# Altium PCB Power_Box_V1.PcbDoc (part 2 of 2)
Units mm, origin at the board's own origin, x right, y up, seen from the top; angles counter-clockwise.
Board outline 100 x 80 mm, 2 copper layers (Top Layer, Bottom Layer); 207 components, 130 nets, 583 pads, 162 vias.
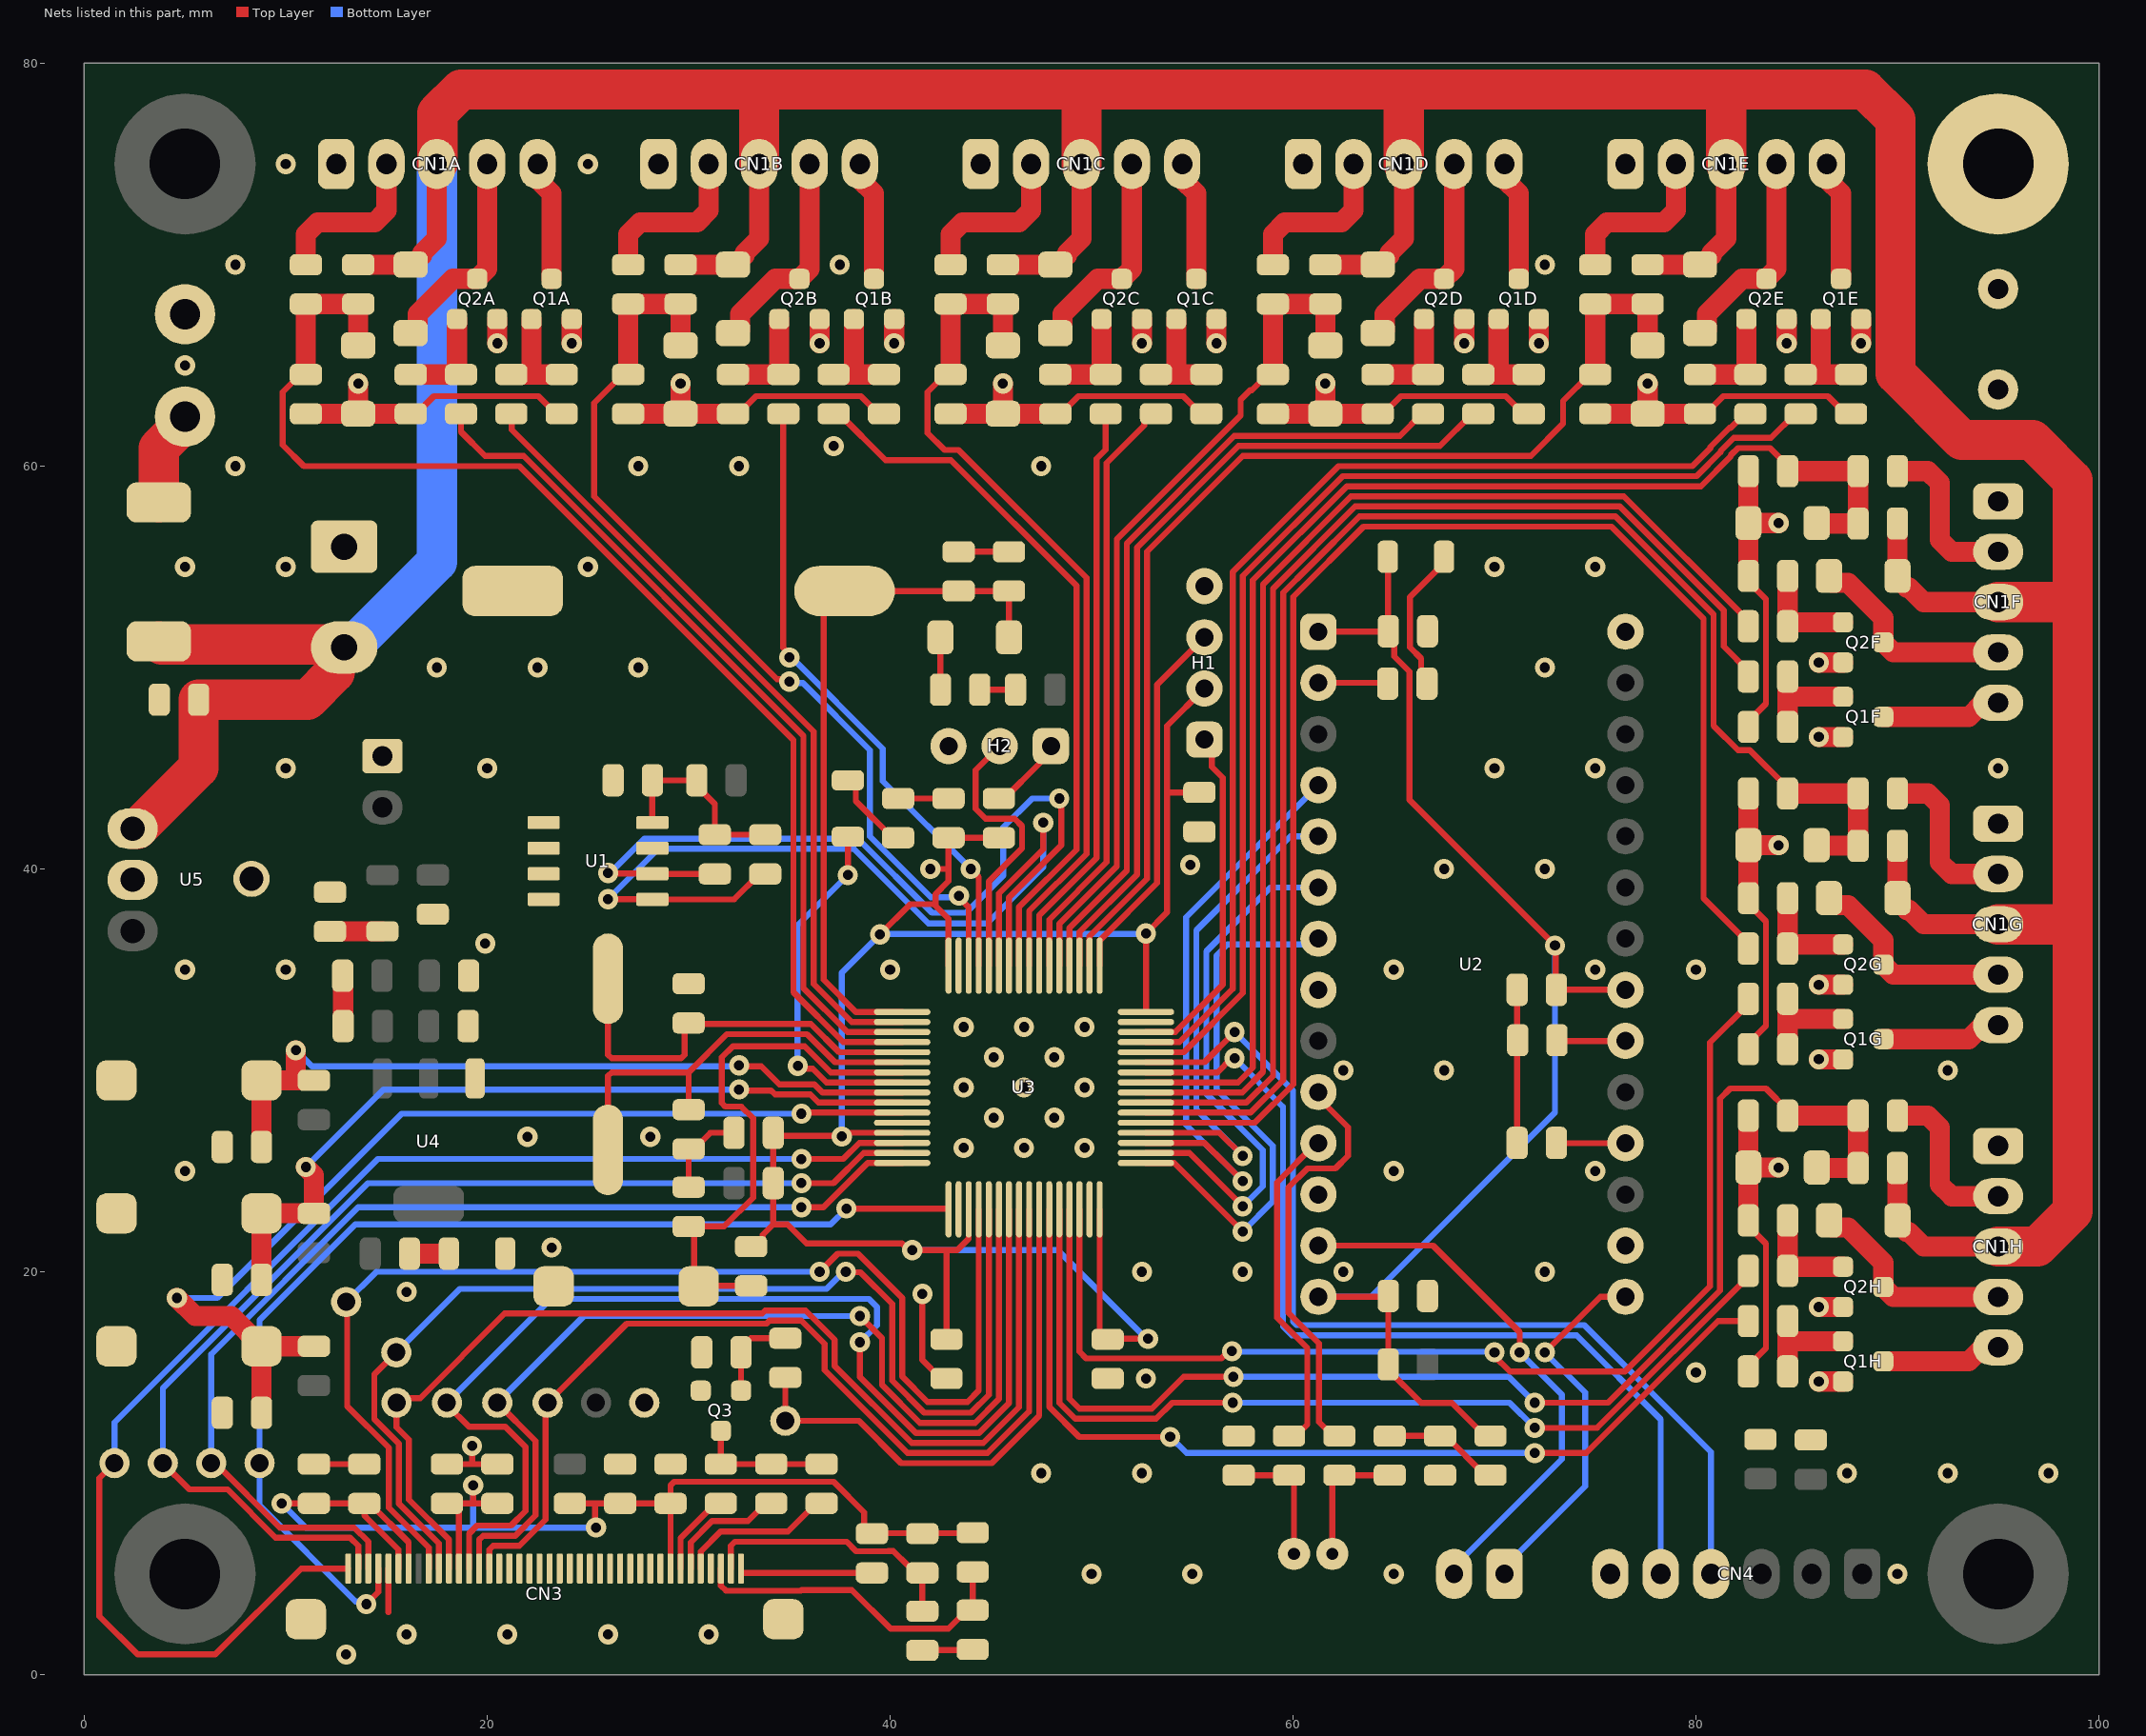
[diagram p2: the nets of this part, all layers, seen from the top]

## Via types
v1: diameter 1, hole 0.5, Top Layer to Bottom Layer, 108 vias
v2: diameter 1, hole 0.5, Top Layer to Bottom Layer, tented top, 54 vias

## Nets (pads, with @x,y where several pads share a name; then routed paths per layer and width w, separated by ;. In a path a pad name is that pad's centre, name@x,y a point inside that pad or via, vN(x,y) a via of type N, cw(c..) or ccw(c..) an arc to the next point about the centre after c; other vN are vias at no path point) (continued)
+12: C34.1 C36.1 CN1A.3 CN1B.3 CN1C.3 CN1D.3 CN1E.3 CN1F.3 CN1G.3 CN1H.3 D1A.2 D1B.2 D1C.2 D1D.2 D1E.2 D1F.2 D1G.2 D1H.2 D3.2 R6A.1 R6B.1 R6C.1 R6D.1 R6E.1 R6F.1 R6G.1 R6H.1 U5.1 | length 294.1
  Top Layer w1: R6A.1@13.6,70 D1A.2@16.2,70 16.305,70 16.792,70.487 16.792,70.592 17.5,71.3 CN1A.3@17.5,75 ; R6B.1@29.6,70 D1B.2@32.2,70 32.305,70 32.792,70.487 32.792,70.592 33.5,71.3 CN1B.3@33.5,75 ; R6C.1@45.6,70 D1C.2@48.2,70 48.305,70 48.792,70.487 48.792,70.592 49.5,71.3 CN1C.3@49.5,75 ; R6D.1@61.6,70 D1D.2@64.2,70 64.305,70 64.792,70.487 64.792,70.592 65.5,71.3 CN1D.3@65.5,75 ; R6E.1@77.6,70 D1E.2@80.2,70 80.305,70 80.792,70.487 80.792,70.592 81.5,71.3 CN1E.3@81.5,75 ; R6H.1@90,25.15 D1H.2@90,22.55 90,22.445 90.487,21.958 90.592,21.958 91.3,21.25 CN1H.3@95,21.25 ; R6G.1@90,41.15 D1G.2@90,38.55 90,38.445 90.487,37.958 90.592,37.958 91.3,37.25 CN1G.3@95,37.25 ; R6F.1@90,57.15 D1F.2@90,54.55 90,54.445 90.487,53.958 90.592,53.958 91.3,53.25 CN1F.3@95,53.25
  Top Layer w2: U5.1@2.4,42 2.65,42 5.675,45.025 C36.1@5.675,48.4 11.078,48.4 12.435,49.757 12.435,50.723 12.712,51 C34.1@12.9,51 12.75,51.15 3.85,51.15 D3.2@3.7,51.3 ; CN1A.3@17.5,75 17.528,75.028 17.528,77.528 18.7,78.7 33.4,78.7 ; CN1B.3@33.5,75 33.5,78.6 33.4,78.7 ; CN1C.3@49.5,75 49.5,78.6 ; CN1D.3@65.5,75 65.5,78.6 ; CN1E.3@81.5,75 81.5,78.6 ; CN1H.3@95,21.25 96.95,21.25 98.7,23 ; CN1G.3@95,37.25 98.6,37.25 ; CN1F.3@95,53.25 98.6,53.25 ; 98.7,37.25 98.7,23 ; 33.4,78.7 88.4,78.7 89.9,77.2 89.9,70.1 89.9,64.6 93.2,61.3 96.7,61.3 98.7,59.3 98.7,23
  Bottom Layer w2: C34.1@12.9,51 13.25,51 17.5,55.25 CN1A.3@17.5,75
+12_IN: D3.1 TR1.2 | length 4.8
  Top Layer w2: D3.1@3.7,58.2 3.7,60.889 5,62.189 TR1.2@5,62.46
GND: 
GND_MCU: BAT1.2 C1A.2 C1B.2 C1C.2 C2A.2 C2B.2 C2C.2 C2D.2 C2E.2 C2F.2 C2G.2 C2H.2 C3.2 C4.2 C7.2 C8.2 C9.2 C10.2 C11.1 C12.1 C13.1 C14.1 C15.1 C16.1 C17.1 C18.1 C19.1 C20.2 C21.2 C22.2 C23.2 C24.2 C25.1 C26.1 C27.1 C28.1 C29.1 C30.1 C31.2 C32.2 C33.2 C34.2 C35.2 C36.2 C37.2 CN1A.1 CN1B.1 CN1C.1 CN1D.1 CN1E.1 CN1F.1 CN1G.1 CN1H.1 CN3.5 CN3.16 CN3.17 CN3.18 CN3.19 CN3.20 CN3.21 CN3.22 CN3.23 CN3.24 CN3.25 CN3.26 CN3.27 CN3.28 CN3.29 CN3.30 CN3.31 CN3.32 CN3.37 CN3.41 CN3.42 CN4.6 H1.4 H2.3 LED2.2 Q1A.1 Q1B.1 Q1C.1 Q1D.1 Q1E.1 Q1F.1 Q1G.1 Q1H.1 Q2A.1 Q2B.1 Q2C.1 Q2D.1 Q2E.1 Q2F.1 Q2G.1 Q2H.1 Q3.1 R3A.2 R3B.2 R3C.2 R3D.2 R3E.2 R3F.2 R3G.2 R3H.2 R5A.1 R5B.1 R5C.1 R5D.1 R5E.1 R5F.1 R5G.1 R5H.1 R13.2 R14.2 R22.1 R23.2 R24.2 R29.2 R30.2 S1A.1 S1B.1 S1C.1 S2.1 TP1.1 TR1.1 U1.1 U1.2 U1.3 U1.4 U1.7 U2.8 U2.12 U2.16 U2.28 U3.12 U3.18 U3.31 U3.47 U3.63 U4.1 U5.2 U5.4 ZD1A.1 ZD1B.1 ZD1C.1 ZD1D.1 ZD1E.1 ZD1F.1 ZD1G.1 ZD1H.1 | length 173.6
  Top Layer w0.3: C13.1@11.4,10.45 C12.1@13.9,10.45 ; 15.1,3.1 CN3.5@15.1,5.265 ; R5A.1@16.202,62.6 16.477,62.6 17.352,63.475 22.547,63.475 23.422,62.6 R3A.2@23.697,62.6 ; C11.1@18,10.45 19.25,10.45 ; v2(19.25,11.35) 19.25,10.45 ; C14.1@20.5,10.45 19.25,10.45 ; C17.1@30,24.2 C19.1@30,26.1 30.275,26.1 31.075,26.9 C24.2@32.25,26.9 ; R5B.1@32.202,62.6 32.477,62.6 33.352,63.475 38.547,63.475 39.422,62.6 R3B.2@39.697,62.6 ; R29.2@40.4,43.5 C22.2@42.9,43.5 ; R23.2@41.6,1.2 41.625,1.225 44.075,1.225 R24.2@44.1,1.25 ; v1(41.6,18.9) 41.6,15.625 42.525,14.7 C23.2@42.8,14.7 ; C30.1@43.4,55.75 C29.1@45.9,55.75 ; R5C.1@48.202,62.6 48.477,62.6 49.352,63.475 54.547,63.475 55.422,62.6 R3C.2@55.697,62.6 ; R5D.1@64.202,62.6 64.477,62.6 65.352,63.475 70.547,63.475 71.422,62.6 R3D.2@71.697,62.6 ; C7.2@71.125,26.4 C9.2@71.125,34 ; R5E.1@80.202,62.6 80.477,62.6 81.352,63.475 86.547,63.475 87.422,62.6 R3E.2@87.697,62.6 ; R5H.1@82.6,22.548 82.6,22.273 83.475,21.398 83.475,16.203 82.6,15.328 R3H.2@82.6,15.053 ; R5G.1@82.6,38.548 82.6,38.273 83.475,37.398 83.475,32.203 82.6,31.328 R3G.2@82.6,31.053 ; R5F.1@82.6,54.548 82.6,54.273 83.475,53.398 83.475,48.203 82.6,47.328 R3F.2@82.6,47.053
  Top Layer w1: C2A.2@11,62.6 ZD1A.1@13.6,62.6 ; C25.1@12.825,34.7 12.85,34.675 12.85,34.35 C26.1@12.85,32.2 ; v2(13.6,64.1) ZD1A.1@13.6,62.6 ; R5A.1@16.202,62.6 ZD1A.1@13.6,62.6 ; v2(20.5,66.1) Q2A.1@20.5,67.3 ; v2(24.2,66.1) Q1A.1@24.2,67.3 ; C2B.2@27,62.6 ZD1B.1@29.6,62.6 ; v2(29.6,64.1) ZD1B.1@29.6,62.6 ; R5B.1@32.202,62.6 ZD1B.1@29.6,62.6 ; v2(36.5,66.1) Q2B.1@36.5,67.3 ; v2(40.2,66.1) Q1B.1@40.2,67.3 ; C2C.2@43,62.6 ZD1C.1@45.6,62.6 ; v2(45.6,64.1) ZD1C.1@45.6,62.6 ; R5C.1@48.202,62.6 ZD1C.1@45.6,62.6 ; v2(52.5,66.1) Q2C.1@52.5,67.3 ; v2(56.2,66.1) Q1C.1@56.2,67.3 ; C2D.2@59,62.6 ZD1D.1@61.6,62.6 ; v2(61.6,64.1) ZD1D.1@61.6,62.6 ; R5D.1@64.202,62.6 ZD1D.1@61.6,62.6 ; v2(68.5,66.1) Q2D.1@68.5,67.3 ; v2(72.2,66.1) Q1D.1@72.2,67.3 ; C2E.2@75,62.6 ZD1E.1@77.6,62.6 v2(77.6,64.1) ; ZD1E.1@77.6,62.6 R5E.1@80.202,62.6 ; R5H.1@82.6,22.548 82.6,25.15 C2H.2@82.6,27.75 ; ZD1H.1@82.6,25.175 v2(84.1,25.175) ; R5G.1@82.6,38.548 82.6,41.15 C2G.2@82.6,43.75 ; ZD1G.1@82.6,41.175 v2(84.1,41.175) ; R5F.1@82.6,54.548 82.6,57.15 C2F.2@82.6,59.75 ; ZD1F.1@82.6,57.175 v2(84.1,57.175) ; v2(84.5,66.1) Q2E.1@84.5,67.3 ; v2(86.1,14.55) Q1H.1@87.3,14.55 ; v2(86.1,18.25) Q2H.1@87.3,18.25 ; v2(86.1,30.55) Q1G.1@87.3,30.55 ; v2(86.1,34.25) Q2G.1@87.3,34.25 ; v2(86.1,46.55) Q1F.1@87.3,46.55 ; v2(86.1,50.25) Q2F.1@87.3,50.25 ; v2(88.2,66.1) Q1E.1@88.2,67.3
  other v1: 13,1 16,2 21,2 26,2 31,2 50,5 55,5 65,5 90,5 87.5,10 92.5,10 97.5,10 52.7,14.7 52.5,20 57.5,20 72.5,20 23.2,21.2 5,25 65,25 43.65,26.15 46.65,26.15 49.65,26.15 22,26.7 28.1,26.7 45.15,27.65 48.15,27.65 43.65,29.15 46.65,29.15 49.65,29.15 67.5,30 92.5,30 45.15,30.65 48.15,30.65 43.65,32.15 46.65,32.15 49.65,32.15 40,35 65,35 80,35 19.9,36.3 67.5,40 72.5,40 54.9,40.2 10,45 20,45 70,45 75,45 95,45 17.5,50 22.5,50 27.5,50 72.5,50 5,55 10,55 25,55 70,55 75,55 27.5,60 32.5,60 5,65 7.5,70 37.5,70 10,75 25,75
  other v2: 47.5,10 52.5,10 80,15 16,19 62.5,20 75,25 62.5,30 5,35 10,35 75,35 7.5,60 47.5,60 37.2,61 72.5,70
ISD_LED: R10.2 U2.2 | length 3.5
  Top Layer w0.3: U2.2@61.26,49.24 64.66,49.24 R10.2@64.7,49.2
ISD_MIC_N: C6.2 U2.11 | length 16.6
  Top Layer w0.3: C6.2@59.801,11.85 60.136,11.85 60.713,12.426 60.713,16.205 59.2,17.718 59.2,24.426 61.154,26.38 U2.11@61.26,26.38
ISD_MIC_P: C5.2 U2.10 | length 20.9
  Top Layer w0.3: U2.10@61.26,28.92 61.26,28.641 62.725,27.176 62.725,25.75 62.105,25.13 60.717,25.13 59.775,24.188 59.775,17.956 61.287,16.443 61.287,12.539 61.977,11.85 C5.2@62.301,11.85
ISD_MISO: U2.4 U3.35 | length 29.1
  Top Layer w0.3: U3.35@52.7,26.4 55.6,26.4 v1(57.5,24.5)
  Bottom Layer w0.3: v1(57.5,24.5) 54.7,27.3 54.7,37.6 U2.4@61.26,44.16
ISD_MOSI: U2.5 U3.36 | length 25.4
  Top Layer w0.3: U3.36@52.7,26.9 56.35,26.9 v2(57.5,25.75)
  Bottom Layer w0.3: v2(57.5,25.75) 55.2,28.05 55.2,36.95 59.87,41.62 U2.5@61.26,41.62
ISD_SCK: U2.6 U3.34 | length 27
  Top Layer w0.3: U3.34@52.7,25.9 54.85,25.9 v2(57.5,23.25)
  Bottom Layer w0.3: v2(57.5,23.25) 58.5,24.25 58.5,26.043 55.7,28.843 55.7,35.907 58.873,39.08 U2.6@61.26,39.08
ISD_SS: U2.7 U3.33 | length 27.1
  Top Layer w0.3: U3.33@52.7,25.4 54.1,25.4 v1(57.5,22)
  Bottom Layer w0.3: v1(57.5,22) 59,23.5 59,26.25 56.2,29.05 56.2,35.7 56.753,36.253 60.973,36.253 U2.7@61.26,36.54
MCU_BOOT0: H2.2 U3.60 | length 13.9
  Top Layer w0.3: U3.60@44.9,35.2 44.9,39.383 46.55,41.033 46.55,42.126 46.185,42.492 44.742,42.492 44.25,42.983 44.25,44.91 H2.2@45.44,46.1
MCU_KEY1: C1A.1 R1A.2 S1A.2 U3.9 | length 38.5
  Top Layer w0.3: v1(32.5,30.25) 32.55,30.2 33.6,30.2 34.5,29.3 36.243,29.3 36.643,28.9 U3.9@40.6,28.9
  Top Layer w1: C1A.1@8.8,26.2 S1A.2@8.8,29.5 10.4,29.5 ; v2(10.5,31) 10.5,29.6 10.4,29.5 ; R1A.2@11.4,29.5 10.4,29.5
  Bottom Layer w0.3: v2(10.5,31) 11.3,30.2 32.45,30.2 v1(32.5,30.25)
MCU_KEY2: C1B.1 R1B.2 S1B.2 U3.10 | length 39.8
  Top Layer w0.3: v2(32.5,29.05) 32.55,29 34.093,29 34.293,28.8 36.036,28.8 36.436,28.4 U3.10@40.6,28.4
  Top Layer w1: C1B.1@8.8,19.6 S1B.2@8.8,22.9 R1B.2@11.4,22.9 11.4,24.8 v1(11,25.2)
  Bottom Layer w0.3: v1(11,25.2) 14.85,29.05 v2(32.5,29.05)
MCU_KEY3: C1C.1 R1C.2 S1C.2 U3.11 | length 50.9
  Top Layer w0.3: v1(35.6,27.85) 35.65,27.9 U3.11@40.6,27.9
  Top Layer w1: v2(4.6,18.7) 5.503,17.797 7.303,17.797 S1C.2@8.8,16.3 ; C1C.1@8.8,13 S1C.2@8.8,16.3 ; R1C.2@11.4,16.3 S1C.2@8.8,16.3
  Bottom Layer w0.3: v2(4.6,18.7) 6.6,18.7 15.75,27.85 v1(35.6,27.85)
MCU_LED1: R2A.2 U3.2 | length 39.7
  Top Layer w0.3: R2A.2@21.197,62.6 21.213,62.585 21.213,61.801 36.2,46.814 36.2,34.293 38.093,32.4 U3.2@40.6,32.4
MCU_LED2: R2B.2 U3.57 | length 35.6
  Top Layer w0.3: R2B.2@37.197,62.6 37.472,62.6 39.773,60.3 43.016,60.3 49.25,54.066 49.25,40.957 46.4,38.107 46.4,36.45 U3.57@46.4,35.2
MCU_LED3: R2C.2 U3.54 | length 29.7
  Top Layer w0.3: U3.54@47.9,35.2 47.9,36.45 47.9,37.486 50.75,40.336 50.75,60.153 52.617,62.02 52.617,62.234 52.983,62.6 R2C.2@53.197,62.6
MCU_LED4: R2D.2 U3.51 | length 41.6
  Top Layer w0.3: U3.51@49.4,35.2 49.4,36.864 52.25,39.714 52.25,54.257 52.25,55.957 57.293,61 58.993,61 67.3,61 68.9,62.6 R2D.2@69.197,62.6
MCU_LED5: R2E.2 U3.44 | length 57.8
  Top Layer w0.3: U3.44@52.7,30.9 54.571,30.9 57.51,33.839 57.51,54.546 62.464,59.5 80.033,59.5 81.225,60.692 81.225,60.748 81.877,61.4 83.722,61.4 84.922,62.6 R2E.2@85.197,62.6
MCU_LED6: R2F.2 U3.39 | length 61
  Top Layer w0.3: U3.39@52.7,28.4 57.686,28.4 59.01,29.724 59.01,53.924 63.086,58 75.514,58 76.214,58 81.375,52.839 81.375,52.139 81.375,51.053 82.6,49.828 R2F.2@82.6,49.553
MCU_LED7: R2G.2 U3.30 | length 56
  Top Layer w0.3: U3.30@49.4,23.1 49.4,17.366 49.4,16.034 49.734,15.7 56.444,15.7 56.805,16.06 v1(56.97,16.06) ; v1(70,16) 70,15.811 70.761,15.05 76.479,15.05 80.7,19.271 80.7,31.377 82.6,33.278 R2G.2@82.6,33.553
  Bottom Layer w0.3: v1(56.97,16.06) 57,16.03 69.97,16.03 v1(70,16)
MCU_LED8: R2H.2 U3.27 | length 48.2
  Top Layer w0.3: U3.27@47.9,23.1 47.9,17.988 47.9,13.286 49.386,11.8 v2(53.9,11.8) ; v1(72,11) 74.55,11 81.103,17.553 R2H.2@82.6,17.553
  Bottom Layer w0.3: v2(53.9,11.8) 53.911,11.8 54.711,11 v1(72,11)
MCU_LOCK1: R4A.1 U3.3 | length 42.5
  Top Layer w0.3: R4A.1@18.701,62.6 18.701,61.699 19.9,60.5 20.807,60.5 21.807,60.5 35.7,46.607 35.7,45.607 35.7,34.086 37.886,31.9 U3.3@40.6,31.9
MCU_LOCK2: R4B.1 U3.61 | length 31.5
  Top Layer w0.3: R4B.1@34.701,62.6 34.701,50.988 35,50.689 v1(35,50.5) ; v1(44,40) 44.4,39.6 U3.61@44.4,35.2
  Bottom Layer w0.3: v1(35,50.5) 35.107,50.5 39.633,45.974 39.633,44.367 v1(44,40)
MCU_LOCK3: R4C.1 U3.55 | length 28.8
  Top Layer w0.3: U3.55@47.4,35.2 47.4,37.693 50.25,40.543 50.25,60.36 50.7,60.81 50.7,62.599 R4C.1@50.701,62.6
MCU_LOCK4: R4D.1 U3.52 | length 39.8
  Top Layer w0.3: U3.52@48.9,35.2 48.9,36.45 48.9,37.071 51.75,39.921 51.75,56.164 57.086,61.5 65.3,61.5 66.4,62.6 R4D.1@66.701,62.6
MCU_LOCK5: R4E.1 U3.45 | length 55.1
  Top Layer w0.3: U3.45@52.7,31.4 54.364,31.4 57.01,34.046 57.01,54.753 62.257,60 79.826,60 80.725,60.899 80.725,60.955 81.67,61.9 81.726,61.9 82.426,62.6 R4E.1@82.701,62.6
MCU_LOCK6: R4F.1 U3.40 | length 59.2
  Top Layer w0.3: U3.40@52.7,28.9 57.479,28.9 58.51,29.931 58.51,54.131 62.879,58.5 76.424,58.5 82.6,52.324 R4F.1@82.6,52.049
MCU_LOCK7: R4G.1 U3.37 | length 73.3
  Top Layer w0.3: U3.37@52.7,27.4 58.1,27.4 60.01,29.31 60.01,53.51 63.5,57 75.8,57 80.375,52.425 80.375,38.549 82.6,36.324 R4G.1@82.6,36.049
MCU_LOCK8: R4H.1 U3.28 | length 48.4
  Top Layer w0.3: U3.28@48.4,23.1 48.4,17.78 48.4,13.493 49.193,12.7 53.2,12.7 54,13.5 v1(57,13.5) ; v1(72,12.25) 75.093,12.25 82.6,19.757 R4H.1@82.6,20.049
  Bottom Layer w0.3: v1(57,13.5) 70.75,13.5 v1(72,12.25)
MCU_MAGNET1: C2A.1 R6A.2 R7A.2 U3.4 ZD1A.2 | length 62.7
  Top Layer w0.3: C2A.1@11,64.55 10.725,64.55 9.85,63.675 9.85,61.05 10.9,60 21.6,60 35.2,46.4 35.2,33.879 37.679,31.4 U3.4@40.6,31.4
  Top Layer w1: C2A.1@11,64.55 11,66.3 R7A.2@11,68.05 R6A.2@13.6,68.05 ZD1A.2@13.6,66
MCU_MAGNET2: C2B.1 R6B.2 R7B.2 U3.62 ZD1B.2 | length 47.6
  Top Layer w0.3: C2B.1@27,64.55 26.725,64.55 25.3,63.125 25.3,58.5 34.378,49.422 34.878,49.422 v1(35,49.3) ; v1(43.418,38.674) 43.418,38.582 43.9,38.1 U3.62@43.9,35.2
  Top Layer w1: C2B.1@27,64.55 R7B.2@27,68.05 R6B.2@29.6,68.05 ZD1B.2@29.6,66
  Bottom Layer w0.3: v1(35,49.3) 35.072,49.228 35.672,49.228 39,45.9 39,41.614 42.014,38.6 43.345,38.6 v1(43.418,38.674)
MCU_MAGNET3: C2C.1 R6C.2 R7C.2 U3.56 ZD1C.2 | length 43
  Top Layer w0.3: C2C.1@43,64.55 42.725,64.55 41.85,63.675 41.85,61.65 42.7,60.8 43.4,60.8 49.75,54.45 49.75,40.75 46.9,37.9 U3.56@46.9,35.2
  Top Layer w1: C2C.1@43,64.55 R7C.2@43,68.05 R6C.2@45.6,68.05 ZD1C.2@45.6,66
MCU_MAGNET4: C2D.1 R6D.2 R7D.2 U3.53 ZD1D.2 | length 42.1
  Top Layer w0.3: U3.53@48.4,35.2 48.4,37.278 51.25,40.128 51.25,56.371 57.4,62.521 57.4,63.3 57.872,63.772 57.947,63.772 58.725,64.55 C2D.1@59,64.55
  Top Layer w1: C2D.1@59,64.55 R7D.2@59,68.05 R6D.2@61.6,68.05 ZD1D.2@61.6,66
MCU_MAGNET5: C2E.1 R6E.2 R7E.2 U3.50 ZD1E.2 | length 56.4
  Top Layer w0.3: U3.50@49.9,35.2 49.9,36.657 52.75,39.507 52.75,55.75 57.5,60.5 71.8,60.5 73.4,62.1 73.4,63.225 74.725,64.55 C2E.1@75,64.55
  Top Layer w1: C2E.1@75,64.55 R7E.2@75,68.05 R6E.2@77.6,68.05 ZD1E.2@77.6,66
MCU_MAGNET6: C2F.1 R6F.2 R7F.2 U3.41 ZD1F.2 | length 67.9
  Top Layer w0.3: U3.41@52.7,29.4 57.272,29.4 58.01,30.138 58.01,54.338 62.672,59 80.24,59 81.725,60.485 81.725,60.541 82.084,60.9 83.675,60.9 84.55,60.025 C2F.1@84.55,59.75
  Top Layer w1: C2F.1@84.55,59.75 R7F.2@88.05,59.75 R6F.2@88.05,57.15 ZD1F.2@86,57.15
MCU_MAGNET7: C2G.1 R6G.2 R7G.2 U3.38 ZD1G.2 | length 75.5
  Top Layer w0.3: U3.38@52.7,27.9 57.893,27.9 59.51,29.517 59.51,53.717 60.83,55.037 63.293,57.5 74.107,57.5 75.307,57.5 76.007,57.5 80.875,52.632 80.875,51.932 80.875,47.112 82.084,45.903 82.672,45.903 84.55,44.025 C2G.1@84.55,43.75
  Top Layer w1: C2G.1@84.55,43.75 R7G.2@88.05,43.75 R6G.2@88.05,41.15 ZD1G.2@86,41.15
MCU_MAGNET8: C2H.1 R6H.2 R7H.2 U3.29 ZD1H.2 | length 67.4
  Top Layer w0.3: U3.29@48.9,23.1 48.9,17.573 48.9,13.7 49.4,13.2 52.993,13.2 54.578,14.785 v2(57.037,14.785) ; v1(71.998,13.498) 75.634,13.498 81.2,19.064 81.2,28.6 81.7,29.1 83.475,29.1 84.55,28.025 C2H.1@84.55,27.75
  Top Layer w1: C2H.1@84.55,27.75 R7H.2@88.05,27.75 R6H.2@88.05,25.15 ZD1H.2@86,25.15
  Bottom Layer w0.3: v2(57.037,14.785) 70.711,14.785 v1(71.998,13.498)
MCU_NRST: C17.2 R25.1 S2.2 U3.7 | length 27.4
  Top Layer w0.3: R25.1@33.1,19.3 30.525,19.3 S2.2@30.5,19.275 30.269,19.506 30.269,21.981 C17.2@30,22.25 31.766,22.25 33.2,23.684 33.2,27.616 32.616,28.2 31.824,28.2 31.648,28.376 31.648,30.648 32.2,31.2 35.757,31.2 37.057,29.9 U3.7@40.6,29.9
MCU_OCS_N: C18.2 U3.5 Y1.1 | length 20.6
  Top Layer w0.3: Y1.1@26,34.55 26,30.776 26.176,30.6 29.624,30.6 29.8,30.776 29.8,32.15 C18.2@30,32.35 30.05,32.3 36.072,32.3 37.472,30.9 U3.5@40.6,30.9
MCU_OCS_P: C19.2 U3.6 Y1.2 | length 21.6
  Top Layer w0.3: Y1.2@26,26.05 26,29.724 26.176,29.9 30,29.9 ; C19.2@30,28.05 30,29.9 ; U3.6@40.6,30.4 37.264,30.4 35.864,31.8 31.9,31.8 30,29.9
MCU_RXD: CN4.4 U3.43 | length 50.1
  Top Layer w0.3: U3.43@52.7,30.4 55.6,30.4 v1(57.1,31.9)
  Bottom Layer w0.3: v1(57.1,31.9) 60,29 60,17.526 60.176,17.35 74.457,17.35 80.75,11.057 CN4.4@80.75,5
MCU_SCL: R8.2 U1.6 U3.58 | length 43.1
  Top Layer w0.3: v2(26,39.8) 26.02,39.78 28.18,39.78 28.205,39.755 31.295,39.755 R8.2@31.3,39.75 ; U3.58@45.9,35.2 45.9,38.58 48.5,41.18 48.5,43.4 v1(48.4,43.5)
  Bottom Layer w0.3: v2(26,39.8) 26.1,39.8 27.8,41.5 38.407,41.5 42.083,37.824 43.77,37.824 45.617,39.671 45.617,42.067 47.05,43.5 v1(48.4,43.5)
MCU_SDA: R9.2 U1.5 U3.59 | length 43.9
  Top Layer w0.3: v2(26,38.5) 26.005,38.495 28.195,38.495 U1.5@28.2,38.49 32.265,38.49 33.525,39.75 R9.2@33.8,39.75 ; U3.59@45.4,35.2 45.4,38.787 47.6,40.987 v1(47.6,42.3)
  Bottom Layer w0.3: v2(26,38.5) 28.5,41 38.2,41 41.9,37.3 44.807,37.3 47.6,40.093 v1(47.6,42.3)
MCU_SWCLK: H1.3 U3.49 | length 18.5
  Top Layer w0.3: U3.49@50.4,35.2 50.4,36.45 53.25,39.3 53.25,49.15 H1.3@55.6,51.5
MCU_SWDIO: H1.1 U3.46 | length 17.3
  Top Layer w0.3: U3.46@52.7,31.9 54.157,31.9 56.51,34.253 56.51,44.533 55.973,45.07 55.973,46.047 H1.1@55.6,46.42
MCU_TXD: CN4.5 U3.42 | length 47.3
  Top Layer w0.3: U3.42@52.7,29.9 56.244,29.9 56.944,30.6 v1(57.1,30.6)
  Bottom Layer w0.3: v1(57.1,30.6) 59.5,28.2 59.5,17.293 59.943,16.85 74.074,16.85 78.25,12.674 CN4.5@78.25,5
MCU_VBAT: BAT1.1 C29.2 C30.2 D2.2 U3.1 | length 34.9
  Top Layer w0.3: U3.1@40.6,32.9 38.3,32.9 36.7,34.5 36.7,53.085 37.415,53.8 C30.2@43.4,53.8 C29.2@45.9,53.8 D2.2@45.9,51.5
NetC4_1: C4.1 R11.2 R12.1 | length 5.8
  Top Layer w0.3: R12.1@64.799,11.85 C4.1@67.299,11.85 ; C4.1@67.299,11.85 67.575,11.85 69.524,9.9 R11.2@69.8,9.9
NetC5_1: C5.1 MIC1.1 R12.2 | length 6.5
  Top Layer w0.3: MIC1.1@61.95,6 61.95,9.548 C5.1@62.301,9.9 R12.2@64.799,9.9
NetC6_1: C6.1 MIC1.2 R14.1 | length 6.5
  Top Layer w0.3: R14.1@57.3,9.9 59.8,9.9 60.05,9.65 MIC1.2@60.05,6
NetC7_1: C7.1 U2.18 | length 3.4
  Top Layer w0.3: C7.1@73.075,26.4 73.095,26.38 U2.18@76.5,26.38
NetC33_1: C33.1 SC2.1
NetCN1A_2: CN1A.2 R7A.1 | length 8.3
  Top Layer w1: R7A.1@11,70 11,71.514 11.586,72.1 14.414,72.1 15,72.686 CN1A.2@15,75
NetCN1A_4: CN1A.4 D1A.1 Q2A.3 | length 10.8
  Top Layer w1: D1A.1@16.2,66.6 16.4,66.6 16.55,66.75 16.55,67.55 18.3,69.3 Q2A.3@19.5,69.3 20,69.8 CN1A.4@20,75
NetCN1A_5: CN1A.5 Q1A.3 | length 6
  Top Layer w1: CN1A.5@22.5,75 22.5,74.244 23.2,73.544 Q1A.3@23.2,69.3
NetCN1B_2: CN1B.2 R7B.1 | length 8.3
  Top Layer w1: R7B.1@27,70 27,71.514 27.586,72.1 30.414,72.1 31,72.686 CN1B.2@31,75
NetCN1B_4: CN1B.4 D1B.1 Q2B.3 | length 10.8
  Top Layer w1: D1B.1@32.2,66.6 32.4,66.6 32.55,66.75 32.55,67.55 34.3,69.3 Q2B.3@35.5,69.3 36,69.8 CN1B.4@36,75
NetCN1B_5: CN1B.5 Q1B.3 | length 6
  Top Layer w1: CN1B.5@38.5,75 38.5,74.244 39.2,73.544 Q1B.3@39.2,69.3
NetCN1C_2: CN1C.2 R7C.1 | length 8.3
  Top Layer w1: R7C.1@43,70 43,71.514 43.586,72.1 46.414,72.1 47,72.686 CN1C.2@47,75
NetCN1C_4: CN1C.4 D1C.1 Q2C.3 | length 10.8
  Top Layer w1: D1C.1@48.2,66.6 48.4,66.6 48.55,66.75 48.55,67.55 50.3,69.3 Q2C.3@51.5,69.3 52,69.8 CN1C.4@52,75
NetCN1C_5: CN1C.5 Q1C.3 | length 6
  Top Layer w1: CN1C.5@54.5,75 54.5,74.244 55.2,73.544 Q1C.3@55.2,69.3
NetCN1D_2: CN1D.2 R7D.1 | length 8.3
  Top Layer w1: R7D.1@59,70 59,71.514 59.586,72.1 62.414,72.1 63,72.686 CN1D.2@63,75
NetCN1D_4: CN1D.4 D1D.1 Q2D.3 | length 10.8
  Top Layer w1: D1D.1@64.2,66.6 64.4,66.6 64.55,66.75 64.55,67.55 66.3,69.3 Q2D.3@67.5,69.3 68,69.8 CN1D.4@68,75
NetCN1D_5: CN1D.5 Q1D.3 | length 6
  Top Layer w1: CN1D.5@70.5,75 70.5,74.244 71.2,73.544 Q1D.3@71.2,69.3
NetCN1E_2: CN1E.2 R7E.1 | length 8.3
  Top Layer w1: R7E.1@75,70 75,71.514 75.586,72.1 78.414,72.1 79,72.686 CN1E.2@79,75
NetCN1E_4: CN1E.4 D1E.1 Q2E.3 | length 10.8
  Top Layer w1: D1E.1@80.2,66.6 80.4,66.6 80.55,66.75 80.55,67.55 82.3,69.3 Q2E.3@83.5,69.3 84,69.8 CN1E.4@84,75
NetCN1E_5: CN1E.5 Q1E.3 | length 6
  Top Layer w1: CN1E.5@86.5,75 86.5,74.244 87.2,73.544 Q1E.3@87.2,69.3
NetCN1F_2: CN1F.2 R7F.1 | length 8.3
  Top Layer w1: R7F.1@90,59.75 91.514,59.75 92.1,59.164 92.1,56.336 92.686,55.75 CN1F.2@95,55.75
NetCN1F_4: CN1F.4 D1F.1 Q2F.3 | length 10.8
  Top Layer w1: D1F.1@86.6,54.55 86.6,54.35 86.75,54.2 87.55,54.2 89.3,52.45 Q2F.3@89.3,51.25 89.8,50.75 CN1F.4@95,50.75
NetCN1F_5: CN1F.5 Q1F.3 | length 6
  Top Layer w1: Q1F.3@89.3,47.55 93.544,47.55 94.244,48.25 CN1F.5@95,48.25
NetCN1G_2: CN1G.2 R7G.1 | length 8.3
  Top Layer w1: R7G.1@90,43.75 91.514,43.75 92.1,43.164 92.1,40.336 92.686,39.75 CN1G.2@95,39.75
NetCN1G_4: CN1G.4 D1G.1 Q2G.3 | length 10.8
  Top Layer w1: D1G.1@86.6,38.55 86.6,38.35 86.75,38.2 87.55,38.2 89.3,36.45 Q2G.3@89.3,35.25 89.8,34.75 CN1G.4@95,34.75
NetCN1G_5: CN1G.5 Q1G.3 | length 6
  Top Layer w1: Q1G.3@89.3,31.55 93.544,31.55 94.244,32.25 CN1G.5@95,32.25
NetCN1H_2: CN1H.2 R7H.1 | length 8.3
  Top Layer w1: R7H.1@90,27.75 91.514,27.75 92.1,27.164 92.1,24.336 92.686,23.75 CN1H.2@95,23.75
NetCN1H_4: CN1H.4 D1H.1 Q2H.3 | length 10.8
  Top Layer w1: D1H.1@86.6,22.55 86.6,22.35 86.75,22.2 87.55,22.2 89.3,20.45 Q2H.3@89.3,19.25 89.8,18.75 CN1H.4@95,18.75
NetCN1H_5: CN1H.5 Q1H.3 | length 6
  Top Layer w1: Q1H.3@89.3,15.55 93.544,15.55 94.244,16.25 CN1H.5@95,16.25
NetD2_1: D2.1 R28.1 | length 2.6
  Top Layer w0.3: R28.1@42.5,48.9 D2.1@42.5,51.5
NetFB5_2: FB5.2 R28.2 | length 1.8
  Top Layer w0.3: R28.2@44.45,48.9 FB5.2@46.225,48.9
NetH2_1: H2.1 R26.2 | length 3.8
  Top Layer w0.3: R26.2@45.4,43.5 45.675,43.5 47.415,45.24 47.415,45.535 H2.1@47.98,46.1
NetLED1_2: LED1.2 R10.1 | length 7.4
  Top Layer w0.3: R10.1@66.65,49.2 66.359,49.491 66.359,50.45 65.8,51.009 65.8,53.5 67.5,55.2 LED1.2@67.5,55.5
NetLED2_1: LED2.1 R27.2 | length 2
  Top Layer w1: R27.2@16.15,20.9 LED2.1@18.1,20.9
NetLED3_1: LED3.1 U3.8 | length 17.9
  Top Layer w0.3: v1(35.422,30.222) 35.556,30.088 36.162,30.088 36.85,29.4 U3.8@40.6,29.4 ; v2(37.9,39.7) LED3.1@37.9,41.6
  Bottom Layer w0.3: v1(35.422,30.222) 35.4,30.244 35.4,37.2 v2(37.9,39.7)
NetLED3_2: LED3.2 R29.1 | length 4.1
  Top Layer w0.3: LED3.2@37.9,44.4 37.958,44.4 38.3,44.058 38.3,43.375 40.125,41.55 R29.1@40.4,41.55
NetLED4_2: LED4.2 R30.1 | length 2.6
  Top Layer w1: R30.1@12.2,36.9 LED4.2@14.8,36.9
NetQ1A_2: Q1A.2 R2A.1 R3A.1 | length 5.4
  Top Layer w1: R2A.1@21.197,64.55 22.447,64.55 ; Q1A.2@22.2,67.3 22.2,64.797 22.447,64.55 ; R3A.1@23.697,64.55 22.447,64.55
NetQ1B_2: Q1B.2 R2B.1 R3B.1 | length 5.4
  Top Layer w1: R2B.1@37.197,64.55 38.447,64.55 ; Q1B.2@38.2,67.3 38.2,64.797 38.447,64.55 ; R3B.1@39.697,64.55 38.447,64.55
NetQ1C_2: Q1C.2 R2C.1 R3C.1 | length 5.4
  Top Layer w1: R2C.1@53.197,64.55 54.447,64.55 ; Q1C.2@54.2,67.3 54.2,64.797 54.447,64.55 ; R3C.1@55.697,64.55 54.447,64.55
NetQ1D_2: Q1D.2 R2D.1 R3D.1 | length 5.4
  Top Layer w1: R2D.1@69.197,64.55 70.447,64.55 ; Q1D.2@70.2,67.3 70.2,64.797 70.447,64.55 ; R3D.1@71.697,64.55 70.447,64.55
NetQ1E_2: Q1E.2 R2E.1 R3E.1 | length 5.4
  Top Layer w1: R2E.1@85.197,64.55 86.447,64.55 ; Q1E.2@86.2,67.3 86.2,64.797 86.447,64.55 ; R3E.1@87.697,64.55 86.447,64.55
NetQ1F_2: Q1F.2 R2F.1 R3F.1 | length 5.4
  Top Layer w1: R3F.1@84.55,47.053 84.55,48.303 ; R2F.1@84.55,49.553 84.55,48.303 ; Q1F.2@87.3,48.55 84.797,48.55 84.55,48.303
NetQ1G_2: Q1G.2 R2G.1 R3G.1 | length 5.4
  Top Layer w1: R3G.1@84.55,31.053 84.55,32.303 ; R2G.1@84.55,33.553 84.55,32.303 ; Q1G.2@87.3,32.55 84.797,32.55 84.55,32.303
NetQ1H_2: Q1H.2 R2H.1 R3H.1 | length 5.4
  Top Layer w1: R3H.1@84.55,15.053 84.55,16.303 ; R2H.1@84.55,17.553 84.55,16.303 ; Q1H.2@87.3,16.55 84.797,16.55 84.55,16.303
NetQ2A_2: Q2A.2 R4A.2 R5A.2 | length 5.3
  Top Layer w1: R5A.2@16.202,64.55 R4A.2@18.525,64.55 ; Q2A.2@18.5,67.3 18.5,64.575 R4A.2@18.525,64.55 ; R4A.2@18.701,64.55 R4A.2@18.525,64.55
NetQ2B_2: Q2B.2 R4B.2 R5B.2 | length 5.3
  Top Layer w1: R5B.2@32.202,64.55 R4B.2@34.525,64.55 ; Q2B.2@34.5,67.3 34.5,64.575 R4B.2@34.525,64.55 ; R4B.2@34.701,64.55 R4B.2@34.525,64.55
NetQ2C_2: Q2C.2 R4C.2 R5C.2 | length 5.3
  Top Layer w1: R5C.2@48.202,64.55 R4C.2@50.525,64.55 ; Q2C.2@50.5,67.3 50.5,64.575 R4C.2@50.525,64.55 ; R4C.2@50.701,64.55 R4C.2@50.525,64.55
NetQ2D_2: Q2D.2 R4D.2 R5D.2 | length 5.3
  Top Layer w1: R5D.2@64.202,64.55 R4D.2@66.525,64.55 ; Q2D.2@66.5,67.3 66.5,64.575 R4D.2@66.525,64.55 ; R4D.2@66.701,64.55 R4D.2@66.525,64.55
NetQ2E_2: Q2E.2 R4E.2 R5E.2 | length 5.3
  Top Layer w1: R5E.2@80.202,64.55 R4E.2@82.525,64.55 ; Q2E.2@82.5,67.3 82.5,64.575 R4E.2@82.525,64.55 ; R4E.2@82.701,64.55 R4E.2@82.525,64.55
NetQ2F_2: Q2F.2 R4F.2 R5F.2 | length 5.3
  Top Layer w1: R4F.2@84.55,52.049 R4F.2@84.55,52.225 ; R5F.2@84.55,54.548 R4F.2@84.55,52.225 ; Q2F.2@87.3,52.25 84.575,52.25 R4F.2@84.55,52.225
NetQ2G_2: Q2G.2 R4G.2 R5G.2 | length 5.3
  Top Layer w1: R4G.2@84.55,36.049 R4G.2@84.55,36.225 ; R5G.2@84.55,38.548 R4G.2@84.55,36.225 ; Q2G.2@87.3,36.25 84.575,36.25 R4G.2@84.55,36.225
NetQ2H_2: Q2H.2 R4H.2 R5H.2 | length 5.3
  Top Layer w1: R4H.2@84.55,20.049 R4H.2@84.55,20.225 ; R5H.2@84.55,22.548 R4H.2@84.55,20.225 ; Q2H.2@87.3,20.25 84.575,20.25 R4H.2@84.55,20.225
NetQ3_2: Q3.2 R21.2 R22.2 | length 4.5
  Top Layer w0.3: Q3.2@32.6,14.1 R22.2@32.6,16 32.6,16.214 33.086,16.7 R21.2@34.8,16.7
NetQ3_3: Q3.3 R15.2 R16.2 R20.2 | length 6.7
  Top Layer w0.3: Q3.3@31.6,12.1 R15.2@31.6,10.45 R16.2@34.1,10.45 R20.2@36.6,10.45
NetR13_1: R13.1 U2.20 | length 3.4
  Top Layer w0.3: R13.1@73.1,31.5 73.14,31.46 U2.20@76.5,31.46
SPK_N: CN2.2 U2.13 | length 26.9
  Top Layer w0.3: U2.13@61.26,21.3 66.95,21.3 71.25,17 v1(71.25,16)
  Bottom Layer w0.3: CN2.2@68,5 68,5.35 73.35,10.7 73.35,13.9 v1(71.25,16)
SPK_P: CN2.1 U2.15 | length 18.6
  Top Layer w0.3: v1(72.5,16) 75.26,18.76 U2.15@76.5,18.76
  Bottom Layer w0.3: CN2.1@70.5,5 70.5,5.35 74.497,9.347 74.497,14.003 v1(72.5,16)
TFT_BLK: R21.1 TP9.1 U3.26 | length 26.8
  Top Layer w0.3: R21.1@34.8,14.75 TP9.1@34.8,12.6 38.447,12.6 40.547,10.5 45.043,10.5 47.4,12.857 47.4,18.195 ; 47.4,18.195 U3.26@47.4,23.1
TFT_CLK: CN3.10 TP4.1 U3.21 | length 58.3
  Top Layer w0.3: TP4.1@15.488,16 14.4,14.912 14.4,12.682 15.618,11.464 15.618,8.489 17.6,6.507 CN3.10@17.6,5.265 ; v1(37.8,20) 37.822,19.978 38.522,19.978 40.1,18.4 40.1,14.9 40.1,14.593 41.693,13 44.007,13 44.9,13.893 U3.21@44.9,23.1
  Bottom Layer w0.3: TP4.1@15.488,16 18.638,19.15 36.852,19.15 37.702,20 v1(37.8,20)
TFT_CS: CN3.9 TP3.1 U3.20 | length 61.9
  Top Layer w0.3: TP3.1@13,18.5 13.05,18.45 13.05,13.325 15.118,11.257 15.118,8.282 17.1,6.3 CN3.9@17.1,5.265 ; v1(36.5,20) 37.4,20.9 38.4,20.9 40.6,18.7 40.6,14.8 41.862,13.538 43.838,13.538 44.4,14.1 U3.20@44.4,23.1
  Bottom Layer w0.3: TP3.1@13,18.5 14.5,20 v1(36.5,20)
TFT_DC: CN3.11 TP5.1 U3.24 | length 56.2
  Top Layer w0.3: CN3.11@18.1,5.265 18.1,6.714 16.118,8.696 16.118,11.671 15.5,12.289 TP5.1@15.5,13.5 15.73,13.73 16.674,13.73 20.869,17.925 33.652,17.925 33.802,18.075 35.798,18.075 37.25,16.623 37.25,15.322 41.072,11.5 44.628,11.5 46.4,13.272 46.4,18.609 U3.24@46.4,23.1
TFT_IM0: CN3.38 R19.2 R24.1 | length 16.5
  Top Layer w0.3: CN3.38@31.6,5.265 31.6,4.414 31.849,4.165 35.565,4.165 35.6,4.2 38.1,4.2 40.025,2.275 42.9,2.275 43.825,3.2 R24.1@44.1,3.2 R19.2@44.1,5.1
TFT_IM1: CN3.39 R18.2 R23.1 | length 13.3
  Top Layer w0.3: CN3.39@32.1,5.265 32.1,6.4 32.3,6.6 37.834,6.6 38.309,6.125 39.891,6.125 39.909,6.143 40.157,6.143 40.875,5.425 40.889,5.425 41.264,5.05 R18.2@41.6,5.05 R23.1@41.6,3.15
TFT_IM2: CN3.40 R17.2 | length 6.7
  Top Layer w0.3: CN3.40@32.6,5.265 32.6,5.05 R17.2@39.1,5.05
TFT_LED_K1: CN3.34 R15.1 | length 4.2
  Top Layer w0.3: CN3.34@29.6,5.265 29.6,6.775 31.325,8.5 R15.1@31.6,8.5
TFT_LED_K2: CN3.35 R16.1 | length 6.1
  Top Layer w0.3: CN3.35@30.1,5.265 30.1,6.568 31.157,7.625 32.95,7.625 33.825,8.5 R16.1@34.1,8.5
TFT_LED_K3: CN3.36 R20.1 | length 7.8
  Top Layer w0.3: CN3.36@30.6,5.265 30.6,6.116 31.584,7.1 34.925,7.1 36.325,8.5 R20.1@36.6,8.5
TFT_MISO: CN3.14 TP7.1 U3.22 | length 51.3
  Top Layer w0.3: CN3.14@19.6,5.265 19.6,6.7 19.8,6.9 21.393,6.9 22.4,7.907 22.4,11.6 TP7.1@20.5,13.5 ; v1(38.5,17.8) 39.6,16.7 39.6,14.693 39.6,14.386 41.486,12.5 44.214,12.5 45.4,13.686 U3.22@45.4,23.1
  Bottom Layer w0.3: TP7.1@20.5,13.5 24.8,17.8 v1(38.5,17.8)
TFT_MOSI: CN3.13 TP6.1 U3.23 | length 59.3
  Top Layer w0.3: TP6.1@18,13.5 18,13.4 19.1,12.3 20.9,12.3 21.9,11.3 21.9,8.114 21.186,7.4 19.5,7.4 19.1,7 CN3.13@19.1,5.265 ; v1(38.5,16.5) 38.5,14.779 41.279,12 44.421,12 45.9,13.479 45.9,18.816 U3.23@45.9,23.1
  Bottom Layer w0.3: TP6.1@18,13.5 23.15,18.65 38.952,18.65 39.35,18.252 39.35,17.344 38.506,16.5 v1(38.5,16.5)
TFT_RES: CN3.15 TP8.1 U3.25 | length 50.2
  Top Layer w0.3: CN3.15@20.1,5.265 20.1,6.2 20.3,6.4 21.6,6.4 22.9,7.7 22.9,13.4 26.925,17.425 33.859,17.425 34.009,17.575 35.591,17.575 36.75,16.416 36.75,15.114 40.864,11 44.836,11 46.9,13.064 46.9,18.402 U3.25@46.9,23.1
TFT_XL: CN3.1 TP10.1 U3.14 | length 69.7
  Top Layer w0.3: TP10.1@1.5,10.5 0.75,9.75 0.75,2.9 2.65,1 6.5,1 10.765,5.265 CN3.1@13.1,5.265 ; v1(35.6,25.6) 37.678,25.6 38.478,26.4 U3.14@40.6,26.4
  Bottom Layer w0.3: TP10.1@1.5,10.5 1.5,12.521 14.579,25.6 v1(35.6,25.6)
TFT_XR: CN3.3 TP12.1 U3.16 | length 54.4
  Top Layer w0.3: TP12.1@6.3,10.5 6.507,10.5 9.707,7.3 13.4,7.3 14.1,6.6 CN3.3@14.1,5.265 ; v1(35.6,23.2) 36.692,23.2 38.892,25.4 U3.16@40.6,25.4
  Bottom Layer w0.3: TP12.1@6.3,10.5 6.3,15.907 13.593,23.2 v1(35.6,23.2)
TFT_YD: CN3.4 TP13.1 U3.17 | length 55.1
  Top Layer w0.3: v1(14,3.5) 14.6,4.1 CN3.4@14.6,5.265 ; v1(37.831,23.137) 42.9,23.137 U3.17@42.9,23.1
  Bottom Layer w0.3: v1(14,3.5) 13.866,3.634 13.464,3.634 8.7,8.398 TP13.1@8.7,10.5 8.7,17.6 13.45,22.35 37.044,22.35 v1(37.831,23.137)
TFT_YU: CN3.2 TP11.1 U3.15 | length 57.8
  Top Layer w0.3: TP11.1@3.9,10.5 5.2,9.2 7.1,9.2 9.5,6.8 13.193,6.8 13.6,6.393 CN3.2@13.6,5.265 ; v2(35.6,24.4) 37.185,24.4 38.685,25.9 U3.15@40.6,25.9
  Bottom Layer w0.3: TP11.1@3.9,10.5 3.9,14.214 14.086,24.4 v2(35.6,24.4)
VCC_EEPROM: C3.1 FB1.1 R8.1 R9.1 U1.8 | length 9.9
  Top Layer w0.3: U1.8@28.2,42.3 C3.1@28.2,44.4 FB1.1@30.4,44.4 30.4,44.125 31.3,43.225 R8.1@31.3,41.7 R9.1@33.8,41.7
VCC_ISD: C8.1 C9.1 C10.1 FB2.2 LED1.1 R11.1 U2.1 U2.14 U2.21 | length 69.3
  Top Layer w0.3: U2.14@61.26,18.76 64.685,18.76 C8.1@64.725,18.8 FB2.2@64.725,15.4 64.725,15.125 66.362,13.488 67.88,13.488 69.518,11.85 R11.1@69.8,11.85 ; U2.1@61.26,51.78 C10.1@64.705,51.78 ; LED1.1@64.7,55.5 64.712,55.488 64.712,51.813 C10.1@64.725,51.8 C10.1@64.705,51.78 ; U2.21@76.5,34 C9.1@73.075,34 73.037,34.037 73.037,36.163 v1(73,36.2) 65.775,43.425 65.775,49.791 65.016,50.55 65.016,51.469 C10.1@64.705,51.78
  Bottom Layer w0.3: U2.14@61.26,18.76 63.86,18.76 73,27.9 v1(73,36.2)
VCC_MCU: C20.1 C21.1 C22.1 C23.1 C24.1 FB4.2 H1.2 R25.2 R26.1 U3.13 U3.19 U3.32 U3.48 U3.64 | length 107.3
  Top Layer w0.3: R25.2@33.1,21.25 33.314,21.25 33.681,21.616 33.681,21.831 34.2,22.35 ; v1(37.598,26.722) 37.57,26.75 34.35,26.75 C24.1@34.2,26.9 34.2,26.75 FB4.2@34.2,24.4 34.2,22.35 ; v1@37.705,26.615 37.989,26.9 U3.13@40.6,26.9 ; v1(39.5,36.75) 41,38.25 42.25,38.25 ; v1(42,40) 42.9,40 ; C23.1@42.8,16.65 42.8,21.054 42.775,21.079 ; U3.64@42.9,35.2 42.9,37.526 42.25,38.176 42.25,38.25 ; U3.19@43.9,23.1 43.9,21.85 43.9,21.643 43.337,21.079 42.775,21.079 ; R26.1@45.4,41.55 C22.1@42.9,41.55 42.9,40 ; U3.32@50.4,23.1 50.4,17.05 C20.1@50.8,16.65 ; C20.1@50.8,16.675 v1(52.8,16.675) ; U3.48@52.7,32.9 v1(52.7,36.8) 53.75,37.85 53.75,43.8 ; C21.1@55.35,43.8 53.75,43.8 ; H1.2@55.6,48.96 53.75,47.11 53.75,43.8 ; 34.2,22.35 34.9,22.35 35.85,21.4 40.59,21.4 40.911,21.079 v1(41.1,21.079) 42.775,21.079 ; 42.25,38.25 42.25,38.749 42.9,39.399 42.9,40
  Bottom Layer w0.3: v1(37.598,26.722) 37.598,34.848 39.525,36.775 52.675,36.775 v1(52.7,36.8) ; v1(41.1,21.079) 48.321,21.079 v1@52.414,16.986
VCC_TFT: C11.2 C12.2 C13.2 C14.2 C15.2 C16.2 CN3.6 CN3.7 CN3.12 CN3.33 FB3.2 R17.1 R18.1 R19.1 | length 64.3
  Top Layer w0.3: v2(9.8,8.5) C13.2@11.4,8.5 C12.2@13.9,8.5 ; CN3.6@15.6,5.265 15.6,6.2 14.1,7.7 13.9,7.9 C12.2@13.9,8.5 ; CN3.7@16.1,5.265 16.1,6.575 14.175,8.5 C12.2@13.9,8.5 ; C11.2@18,8.5 C11.2@18.214,8.5 ; CN3.12@18.6,5.265 18.6,8.114 C11.2@18.214,8.5 ; v2(19.3,9.4) 19.3,8.557 19.357,8.5 ; C14.2@20.5,8.5 19.357,8.5 ; FB3.2@24.1,8.5 25.35,8.5 ; v1(25.4,7.3) 25.35,7.35 25.35,8.5 ; CN3.33@29.1,5.265 C15.2@29.1,8.5 ; R19.1@44.1,7.05 44.075,7.025 39.125,7.025 R17.1@39.1,7 39.079,7 38.712,7.366 38.712,8.054 37.191,9.575 29.276,9.575 29.1,9.399 C15.2@29.1,8.5 ; C11.2@18.214,8.5 19.357,8.5 ; 25.35,8.5 C16.2@26.6,8.5 C15.2@29.1,8.5
  Bottom Layer w0.3: v2(9.8,8.5) 11,7.3 19.3,7.3 ; v2(19.3,9.4) 19.3,7.3 ; v1(25.4,7.3) 19.3,7.3
pads on no net: CN3.8 CN4.1 CN4.2 SC1.1 SC3.1 SC4.1 U2.3 U2.9 U2.17 U2.19 U2.22 U2.23 U2.24 U2.25 U2.26 U2.27

## Polygon pours and split planes (outlines as drawn)
GND_MCU on Bottom Layer "GND_3" (solid, remove dead copper, pour order 0): 0,0 0,80 100,80 100,0
GND_MCU on Top Layer "GND_3" (solid, remove dead copper, pour order 1): 0,0 0,80 100,80 100,0

## Keep-outs
Keep-Out Layer:
  the board outline again, w0.2

## Other copper
Top Layer:
  region net NetC33_1: 94.5,67.5 99.5,67.5 99.5,79.5 91.1,79.5 91.1,70.9
Bottom Layer:
  region net NetC33_1: 94.5,67.5 99.5,67.5 99.5,79.5 91.1,79.5 91.1,70.9

## Silkscreen, mask and mechanical layers (free items; w line width, h text height)
Top Overlay:
  drawing of 125 lines, arcs and shapes, not listed
  text "CH1" at 25.05,79.9 h1.6 r180
  text "CH2" at 41.05,79.9 h1.6 r180
  text "CH3" at 57.05,79.9 h1.6 r180
  text "CH4" at 73.05,79.9 h1.6 r180
  text "CH5" at 89.05,79.9 h1.6 r180
  text "GD" at 13.604,78.632 h1.6 r180
  text "MG" at 16.159,78.632 h1.6 r180
  text "12" at 18.464,78.632 h1.6 r180
  text "LK" at 20.998,78.632 h1.6 r180
  text "LD" at 23.464,78.632 h1.6 r180
  text "GD" at 29.604,78.632 h1.6 r180
  text "MG" at 32.159,78.632 h1.6 r180
  text "12" at 34.464,78.632 h1.6 r180
  text "LK" at 36.998,78.632 h1.6 r180
  text "LD" at 39.464,78.632 h1.6 r180
  text "GD" at 45.604,78.632 h1.6 r180
  text "MG" at 48.159,78.632 h1.6 r180
  text "12" at 50.464,78.632 h1.6 r180
  text "LK" at 52.998,78.632 h1.6 r180
  text "LD" at 55.464,78.632 h1.6 r180
  text "GD" at 61.604,78.632 h1.6 r180
  text "MG" at 64.159,78.632 h1.6 r180
  text "12" at 66.464,78.632 h1.6 r180
  text "LK" at 68.998,78.632 h1.6 r180
  text "LD" at 71.464,78.632 h1.6 r180
  text "GD" at 77.604,78.632 h1.6 r180
  text "MG" at 80.159,78.632 h1.6 r180
  text "12" at 82.464,78.632 h1.6 r180
  text "LK" at 84.998,78.632 h1.6 r180
  text "LD" at 87.464,78.632 h1.6 r180
  text "GD" at 0.45,72.239 h1.6 r270
  text "12" at 7.411,58.675 h1.6
  text "GD" at 98.632,57.146 h1.6 r90
  text "ISD" at 63.95,56.55 h1.6
  text "MG" at 98.632,54.591 h1.6 r90
  text "12" at 98.632,52.286 h1.6 r90
  text "LK" at 98.632,49.752 h1.6 r90
  text "L" at 40.313,47.459 h1.6 r270
  text "H" at 49.193,47.459 h1.6 r270
  text "LD" at 98.632,47.286 h1.6 r90
  text "CH6" at 99.9,45.7 h1.6 r90
  text "LD" at 35.683,45.15 h1.6 r270
  text "GD /  / CL /  / 3V /  / DI" at 52.071,45.05 h1.6
  text "GD" at 98.632,41.146 h1.6 r90
  text "5V" at 11.725,39.7 h1.6
  text "MG" at 98.632,38.591 h1.6 r90
  text "12" at 98.632,36.286 h1.6 r90
  text "LK" at 98.632,33.752 h1.6 r90
  text "LD" at 98.632,31.286 h1.6 r90
  text "CH7" at 99.9,29.7 h1.6 r90
  text "GD" at 98.632,25.146 h1.6 r90
  text "MG" at 98.632,22.591 h1.6 r90
  text "12" at 98.632,20.286 h1.6 r90
  text "3V" at 17.35,18.625 h1.6
  text "LK" at 98.632,17.752 h1.6 r90
  text "CS" at 14.125,17.493 h1.6
  text "CLK" at 16.55,16.993 h1.6
  text "LD" at 98.632,15.286 h1.6 r90
  text "MI" at 19.7,14.75 h1.6
  text "3V" at 25.607,14.75 h1.6 r90
  text "GD" at 26.025,14.743 h1.6
  text "RES" at 23.307,14.7 h1.6 r90
  text "MO" at 16.85,14.668 h1.6
  text "CH8" at 99.9,13.7 h1.6 r90
  text "BLK" at 36.05,12.075 h1.6
  text "YU" at 1.901,11.718 h1.6
  text "XL" at 0.25,11.7 h1.6
  text "XR" at 4,11.7 h1.6
  text "DC" at 12.9,11.493 h1.6
  text "Charging Box / Managment Board / 8 Ch - Ver 0.0" at 43.937,8.881 h1.6
  text "YD" at 7.501,8.3 h1.6
  text "SPK" at 65.567,1.35 h1.6
  text "GD" at 74.646,1.368 h1.6
  text "TX" at 77.252,1.368 h1.6
  text "RX" at 79.71,1.368 h1.6
  text "+5" at 82.091,1.368 h1.6
  text "NC" at 84.646,1.368 h1.6
  text "NC" at 87.146,1.368 h1.6
  text "FINGER PRINT" at 73.2,0.1 h1.6
Bottom Paste:
  lines w1: 12.9,51 13.15,51 17.5,55.35 17.5,75
Top Solder:
  lines w1: 0.725,39.45 4.125,39.45

## Dimensions
0,0 to 100,0 on Mechanical 1
0,0 to 0,80 on Mechanical 1